# Altium PCB PA_CONTROL_BOARD.PcbDoc
Units mm, origin at the board's own origin, x right, y up, seen from the top; angles counter-clockwise.
Board outline 99.6 x 97.1 mm, 4 copper layers (Top Layer, L2(GND), L3(GND), Bottom Layer), stack 1.57 mm thick; 100 components, 82 nets, 366 pads, 63 vias.
Unrouted connection lines stored in the file: 46.
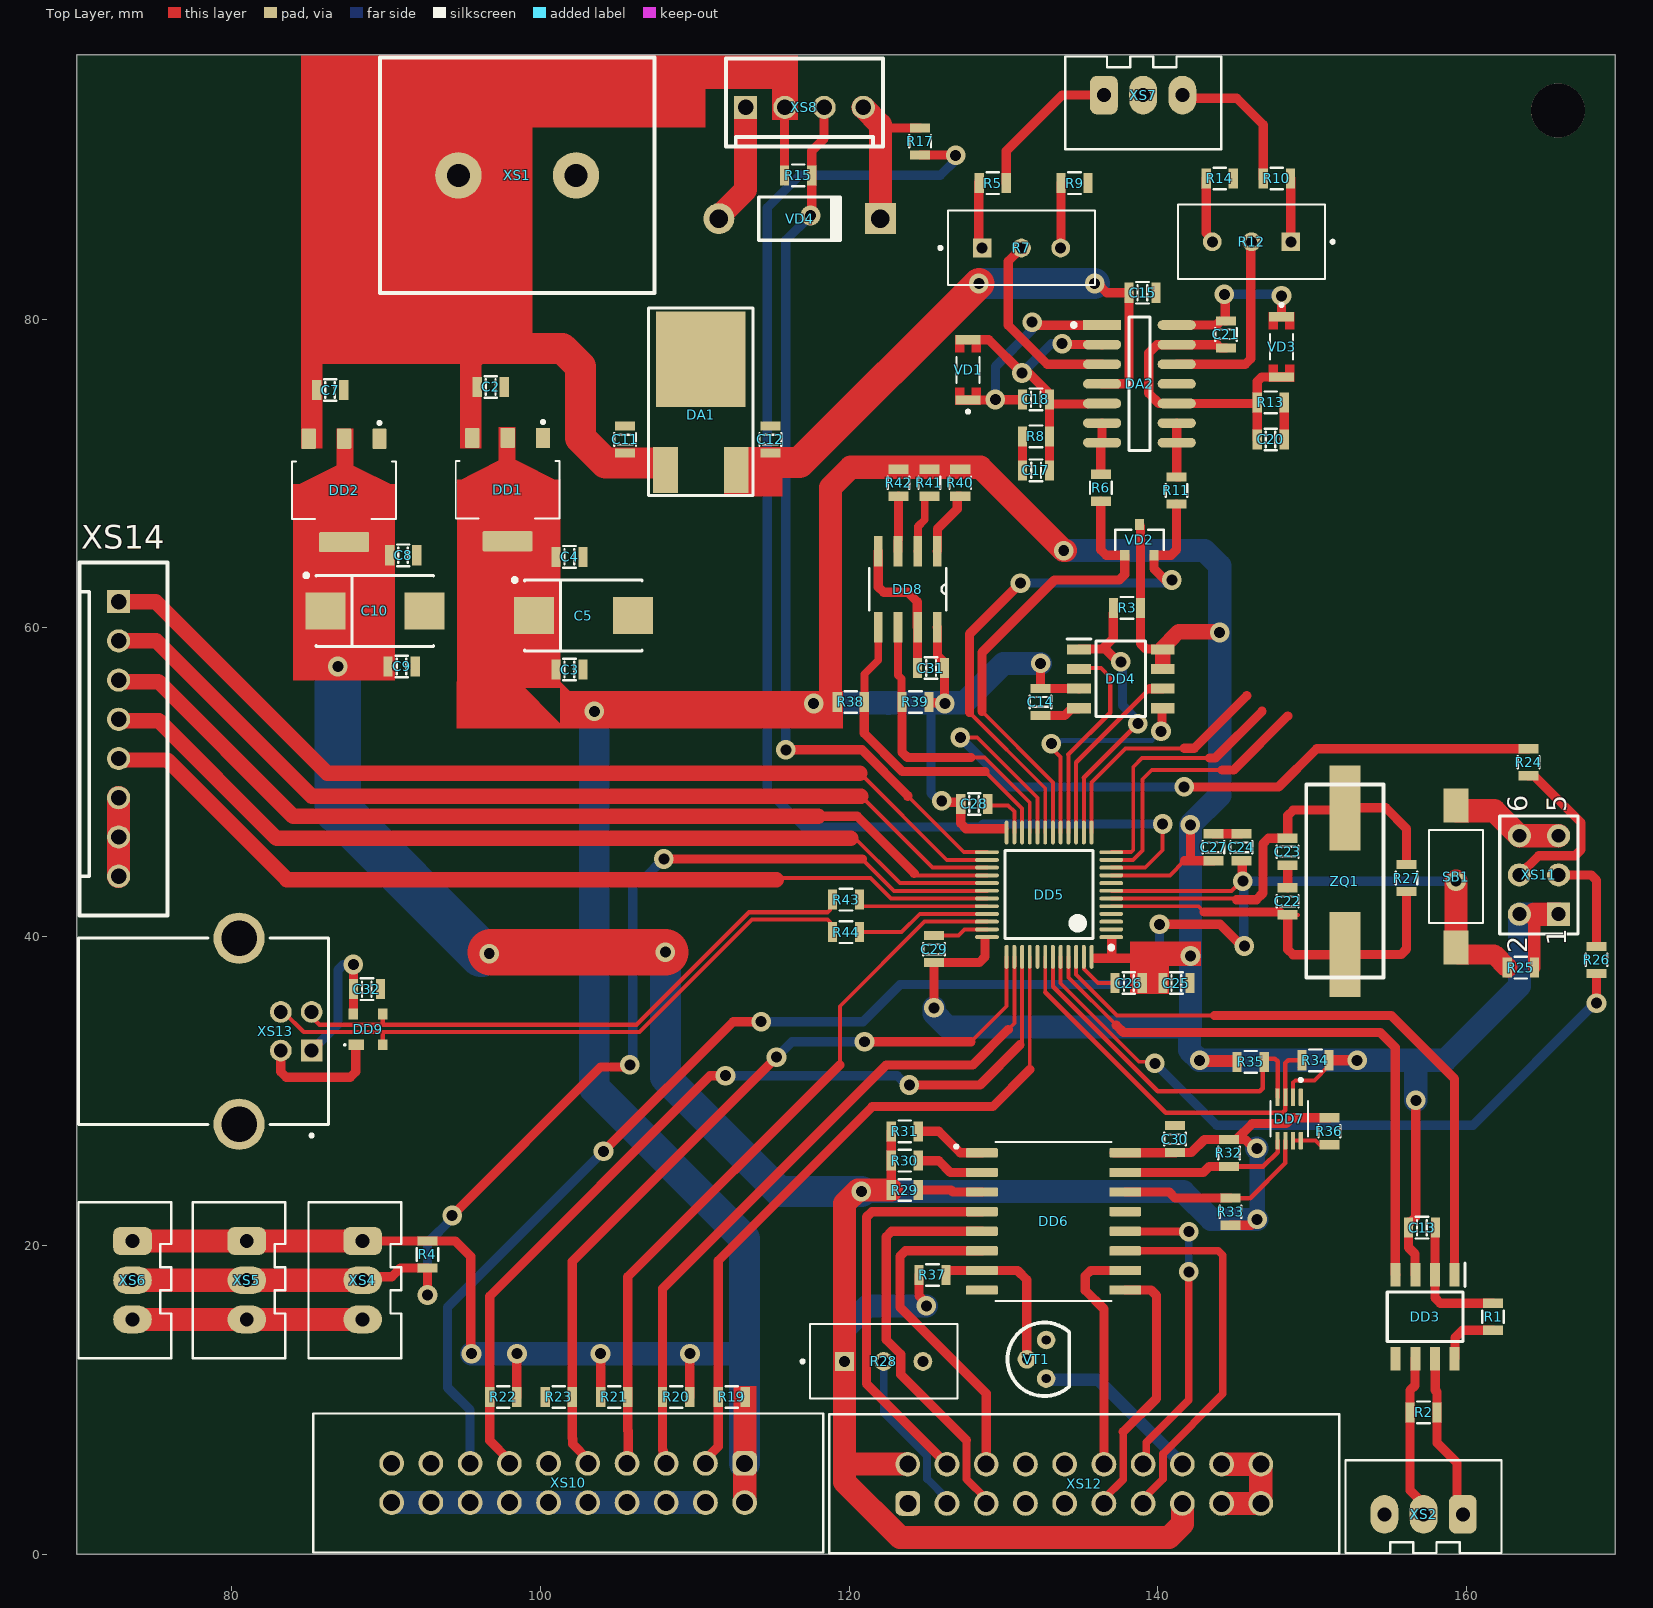
[diagram p0: Top Layer view]
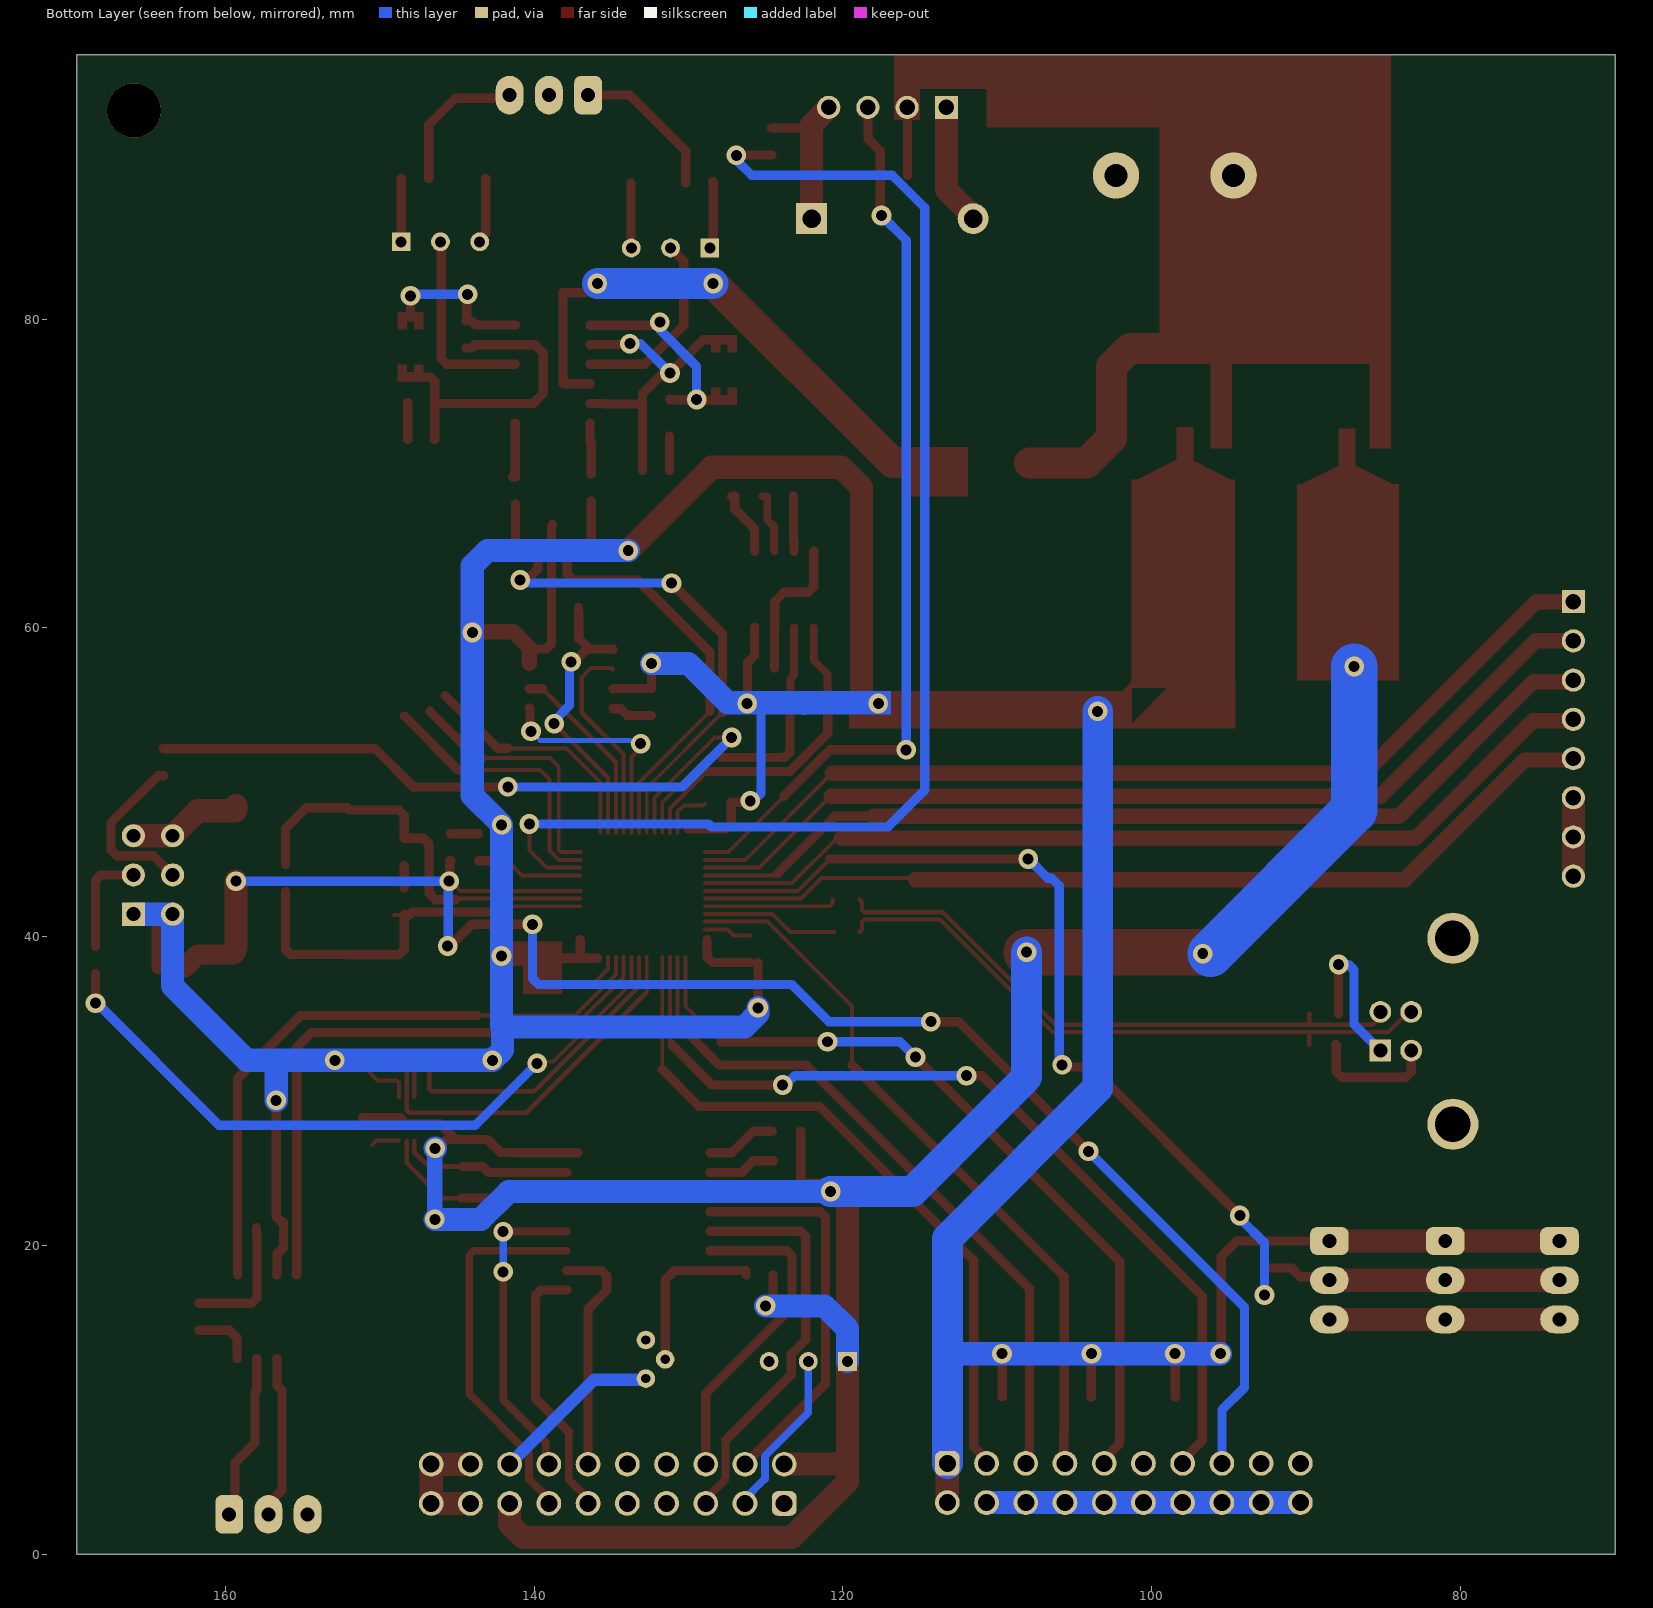
[diagram p1: Bottom Layer view, seen from below]

## Layer stack, top to bottom
Top Solder: solder mask 0.0254, Solder Resist, Dk 3.5
Top Layer: signal copper 0.035
Dielectric 2: prepreg 0.2, PP-017, Dk 4.6
L2(GND): signal copper 0.0175
Dielectric 1: core 1.065, Core-039, Dk 4.6
L3(GND): signal copper 0.0175
Dielectric 3: prepreg 0.2, PP-017, Dk 4.6
Bottom Layer: signal copper 0.035
Bottom Solder: solder mask 0.0254, Solder Resist, Dk 3.5

## Board outline
70,0 169.6,0 169.6,97.1 70,97.1

## Design rules (kind name [scope] priority, off if disabled: settings)
Clearance [All] p1: gap=0.2 ignorepadtopadclearanceinfootprint=FALSE
DiffPairsRouting [InDifferentialPair('USB_D')] p1: maxlimit=0.254 minlimit=0.203 mostfreqgap=0.254 toplayer_maxgap=0.203 toplayer_prefgap=0.203 toplayer_minwidth=0.268 toplayer_maxwidth=0.268 toplayer_prefwidth=0.268 bottomlayer_maxgap=0.203 bottomlayer_prefgap=0.203 bottomlayer_minwidth=0.268 bottomlayer_maxwidth=0.268 bottomlayer_prefwidth=0.268 impedanceprofiledriven=TRUE impedanceprofileid={E65597A1-3157-4E75-9F68-0D89B3AF5645} impedanceprofilevalue=90.000000 maxuncoupledlength=12.7
MatchedLengths [InDifferentialPair('RD')] p1: tolerance=1 checknetsindiffpair=FALSE checkdiffpairvsdiffpair=TRUE checkxsignals=TRUE checkothers=TRUE
PolygonConnect [All] p1: connectstyle=Relief reliefconductorwidth=0.254 reliefentries=4 polygonreliefangle="90 Angle" airgapwidth=0.254
RoutingVias [All] p1: holewidth=0.711 width=1.27 viastyle="Through Hole" minholewidth=0.3 minwidth=0.5 maxholewidth=0.711 maxwidth=1.27
SolderMaskExpansion [All] p1: expansion=0.102 istentingtop=FALSE
Width [All] p1: maxlimit=3 minlimit=0.2 preferedwidth=0.3
29 further rules are at their usual default settings.

## Classes and differential pairs
component class USB: C32 DD9 R43 R44 XS13
component class EEPROM: C31 DD8 R38 R39 R40 R41 R42
component class IIC_LCD: C30 DD6 DD7 R28 R29 R30 R31 R32 R33 R34 R35 R36 R37 VT1 XS12
component class MCU_CORE: C22 C23 C24 C25 C26 C27 C28 C29 DD5 R24 R25 R26 R27 SB1 XS11 XS14 ZQ1
component class FAN_CTRL: R15 R17 VD4 XS8
component class JTAG_MCU: R19 R20 R21 R22 R23 XS10
component class DIRECTIONAL_COUPLER: C15 C17 C18 C20 C21 DA2 R5 R6 R7 R8 R9 R10 R11 R12 R13 R14 VD1 VD2 VD3 XS7
component class FLASH: C14 DD4 R3
component class CAN: C13 DD3 R1 R2 XS2
component class DS18B20: R4 XS4 XS5 XS6
component class POWER_SUPPLY: C2 C3 C4 C5 C7 C8 C9 C10 C11 C12 DA1 DD1 DD2 XS1
differential pair USB_D: +USB_D_P -USB_D_N

## Components (designator, comment, footprint, x,y, rotation, side; value= is the part's Value field where it differs from the comment)
C2 "0.1 uF" C0805C 96.8,75.6 r180 top
C3 "0.1 uF" C0805C 101.9,57.3 r180 top
C4 "0.1 uF" C0805C 101.9,64.6 r180 top
C5 "10uFx10V" TECAP_D 102.8,60.8 r0 top
C7 "0.1 uF" C0805C 86.4,75.4 r180 top
C8 "0.1 uF" C0805C 91.125,64.7 r180 top
C9 "0.1 uF" C0805C 91.025,57.5 r180 top
C10 "10uFx10V" TECAP_D 89.3,61.1 r0 top
C11 "0.33 uF" C0805C 105.5,72.2 r270 top
C12 "0.1 uF" C0805C 114.9,72.2 r270 top
C13 "0.1uF" C0805C 157.1,21.16 r180 top
C14 "0.1uF" C0805C 132.4,55.2 r90 top
C15 "0.1uF" C0805C 139,81.7 r180 top
C17 "1uF" C0805C 132.1,70.2 r0 top
C18 "10n" C0805C 132.1,74.8 r180 top
C20 "1uF" C0805C 147.3,72.2 r180 top
C21 "10n" C0805C 144.4,79 r90 top
C22 "22pF" C0805C 148.4,42.3 r270 top
C23 "22pF" C0805C 148.4,45.5 r90 top
C24 "0.1uF" C0805C 145.4,45.8 r270 top
C25 "0.1uF" C0805C 141.2,37 r180 top
C26 "0.1uF" C0805C 138.1,37 r0 top
C27 "0.1uF" C0805C 143.6,45.8 r270 top
C28 "0.1uF" C0805C 128.1,48.6 r180 top
C29 "0.1uF" C0805C 125.5,39.2 r270 top
C30 "0.1 uF" C0805C 141.1,26.9 r270 top
C31 "0.1 uF" C0805C 125.3,57.4 r0 top
C32 "0.1 uF" C0805C 88.781,36.606 r180 top
DA1 "78M08CDT" SC_TO-252AA 110.4,77.4 r270 top
DA2 "LM224" Texas_Instruments_D0014A_IPC_A 138.8,75.8 r0 top
DD1 "AMS1117-3.3" SOT229P700X180-4N 97.89,68.955 r180 top
DD2 "AMS1117-5.0" SOT229P700X180-4N 87.3,68.9 r180 top
DD3 "SN65HVD230" "SOIC8 (SO-8)" 157.3,15.4 r270 top
DD4 "W25Q128" "SOIC8 (SO-8)" 137.6,56.7 r0 top
DD5 "STM32F103C8T6" STM-LQFP48_L 132.95,42.725 r180 top
DD6 "PCF8574ADW" SOIC127P1030X265-16N 133.24,21.565 r0 top
DD7 "PCA9306DCUT" SOP50P310X90-8N 148.5,28.2 r270 top
DD8 "AT24C128C-SSHM-T" SOIC127P600X175-8N 123.8,62.5 r270 top
DD9 "PRTR5V0U2X" SOT143B 88.85,34 r0 top
R1 "R0805" C0805R 161.7,15.4 r90 top
R2 "120" C0805R 157.2,9.2 r180 top
R3 "10k" C0805R 138,61.3 r0 top
R4 "4k7" C0805R 92.7,19.425 r270 top
R5 "10k" C0805R 129.3,88.8 r0 top
R6 "1k" C0805R 136.3,69.075 r90 top
R7 "20k" TRIM_3296W-1-254LF 131.16,84.6 r0 top
R8 "120k" C0805R 132.1,72.4 r180 top
R9 "4k7" C0805R 134.6,88.8 r180 top
R10 "10k" C0805R 147.7,89.1 r180 top
R11 "1k" C0805R 141.2,68.9 r90 top
R12 "20k" TRIM_3296W-1-254LF 146.06,85 r180 top
R13 "120k" C0805R 147.3,74.6 r180 top
R14 "4k7" C0805R 144,89.1 r180 top
R15 "4k7" C0805R 116.7,89.3 r180 top
R17 "120" C0805R 124.6,91.5 r90 top
R19 "10k" C0805R 112.4,10.2 r0 top
R20 "10k" C0805R 108.8,10.2 r0 top
R21 "10k" C0805R 104.8,10.2 r180 top
R22 "10k" C0805R 97.6,10.2 r0 top
R23 "10k" C0805R 101.2,10.2 r0 top
R24 "10k" C0805R 164,51.3 r90 top
R25 "100k" C0805R 163.5,38 r180 top
R26 "10k" C0805R 168.4,38.5 r270 top
R27 "1M" C0805R 156.1,43.8 r270 top
R28 "RES_VAR" TRIM_3296W-1-254LF 122.24,12.5 r0 top
R29 "10k" C0805R 123.6,23.6 r180 top
R30 "10k" C0805R 123.6,25.5 r180 top
R31 "10k" C0805R 123.6,27.4 r180 top
R32 "4k7" C0805R 144.6,26 r90 top
R33 "4k7" C0805R 144.7,22.2 r270 top
R34 "4k7" C0805R 150.2,32 r0 top
R35 "4k7" C0805R 146,31.9 r180 top
R36 "200k" C0805R 151.1,27.4 r90 top
R37 "4k7" C0805R 125.4,18.1 r180 top
R38 "4k7" C0805R 120.1,55.2 r180 top
R39 "4k7" C0805R 124.3,55.2 r0 top
R40 "10k" C0805R 127.2,69.4 r90 top
R41 "10k" C0805R 125.2,69.4 r90 top
R42 "10k" C0805R 123.2,69.4 r90 top
R43 "10" C0805R 119.8,42.4 r180 top
R44 "10" C0805R 119.8,40.3 r180 top
SB1 "1437566-3 (FSMSM)" 1437566-3 159.3,43.9 r90 top
VD1 "LL4148" DIO_LL4148 127.7,76.7 r90 top
VD2 "BAT54C" BAT54C_SOT23-3 138.8,65.7 r0 top
VD3 "LL4148" DIO_LL4148 148,78.2 r270 top
VD4 "1N4728A" DO-41 116.8,86.5 r0 top
VT1 "SS8050CBU" TO-92-A 132.235,12.637 r270 top
XS1 "POWER" DG25C-B-02P-13 102.32,89.3 r180 top value=Connector
XS2 "CAN" YX-XH-3 159.74,2.6 r180 top
XS4 "DS18B20" YX-XH-3 88.5,20.3 r270 top
XS5 "DS18B20" YX-XH-3 81,20.3 r270 top
XS6 "DS18B20" YX-XH-3 73.6,20.3 r270 top
XS7 "SWR" YX-XH-3 136.5,94.5 r0 top
XS8 "FAN" WF-4 117.11,93.7 r180 top value=Connector
XS10 "Text" IDC-20 101.81,4.63 r180 top value=Connector
XS11 "BOOT" PLD2-3 164.67,44 r90 top value=Connector
XS12 "Text" IDC-20 135.23,4.575 r0 top value=Connector
XS13 "USB" SAMTEC_USB-B-S-X-X-TH 80.5,33.88 r270 top
XS14 "Text" WF-8 72.7,56.62 r90 top value=Connector
ZQ1 "HC49SM" HC49SM 152.1,43.6 r90 top

## Footprints (in the part's own frame and the unit in brackets; to place one, negate y for a bottom-side part, rotate by r counter-clockwise, add the part's x,y. Pads: shape width x height; smd on the part's side, far side on the other; paste and mask are expansions set on the pad)
1437566-3 [mm]
  rect 2.18x1.6 smd: 1(-4.6,0) 2(4.6,0)
  silkscreen extent -3,-1.75 3,1.75, body extent -5.54,-1.75 5.54,1.75, height 4.87
BAT54C_SOT23-3 [mm]
  rect 0.6x0.7 smd: 1(-0.95,-1) 2(0.95,-1) 3(0,1)
  silkscreen extent -1.57,-0.65 1.57,0.66, body extent -1.45,-1.17 1.45,1.13, height 1.1
C0805C [mm]
  rect 0.6x1.3 smd: 1(-0.875,0) 2(0.875,0)
  silkscreen extent -0.4,-0.7 0.4,0.7, body extent -1,-0.6 1,0.6, height 0.8
C0805R [mm]
  rect 0.6x1.3 smd: 1(-0.875,0) 2(0.875,0)
  silkscreen extent -0.4,-0.7 0.4,0.7, body extent -1,-0.6 1,0.6, height 0.5
DG25C-B-02P-13 [mm]
  round 3 hole 1.5: 1(0,0) 2(7.62,0)
  silkscreen extent -5.08,-7.62 12.7,7.62, body extent -4.56,-6.44 12.18,6.79, height 14.8
DIO_LL4148 [mm]
  rect 0.6x1.65 smd: 1(-1.95,0) 2(1.95,0)
  Top Layer region: -1.15,0.25 -1.65,0.25 -1.65,-0.25 -1.15,-0.25 -1.15,-0.825 -2.24,-0.825 -2.24,0.825 -1.15,0.825
  Top Layer region: 2.25,-0.825 1.15,-0.825 1.15,-0.25 1.65,-0.25 1.65,0.25 1.15,0.25 1.15,0.825 2.25,0.825
  silkscreen extent -2.8,-0.75 0.83,0.75, body extent -1.73,-0.75 1.73,0.75, height 1.5
DO-41 [mm] "Diode, Axial; Body 5.2 x 2.7 mm (LxDia. max), Lead Dia. 0.86 mm (max)"
  round 2 hole 1.2: 1(-5.23,0)
  rect 2x2 hole 1.2: 2(5.23,0)
  silkscreen extent -2.65,-1.4 2.75,1.4
HC49SM [mm]
  rect 5.5x2 smd: 1(-4.75,0) 2(4.75,0)
  silkscreen extent -6.25,-2.5 6.25,2.5, body extent -6.2,-2.35 6.2,2.35, height 3.8
IDC-20 [mm]
  rrect50% 1.6x1.6 hole 1.1: 1(-11.43,-1.27)
  round 1.6 hole 1.1: 2(-11.43,1.27) 3(-8.89,-1.27) 4(-8.89,1.27) 5(-6.35,-1.27) 6(-6.35,1.27) 7(-3.81,-1.27) 8(-3.81,1.27) 9(-1.27,-1.27) 10(-1.27,1.27) 11(1.27,-1.27) 12(1.27,1.27) 13(3.81,-1.27) 14(3.81,1.27) 15(6.35,-1.27) 16(6.35,1.27) 17(8.89,-1.27) 18(8.89,1.27) 19(11.43,-1.27) 20(11.43,1.27)
  silkscreen extent -16.51,-4.5 16.51,4.5, body extent -16.5,-4.5 16.5,4.5, height 9
PLD2-3 [mm]
  rect 1.5x1.5 hole 0.9: 1(-2.54,-1.27)
  round 1.5 hole 0.9: 2(-2.54,1.27) 3(0,-1.27) 4(0,1.27) 5(2.54,-1.27) 6(2.54,1.27)
  silkscreen extent -3.81,-2.54 3.81,2.54, body extent -3.84,-2.52 3.78,2.56, height 8.6
SAMTEC_USB-B-S-X-X-TH [mm]
  rect 1.408x1.408 hole 0.9: 1(1.25,4.7)
  round 1.408 hole 0.9: 2(-1.25,4.7) 3(-1.25,2.7) 4(1.25,2.7)
  round 3.316 hole 2.3: S1(-6.02,0) S2(6.02,0)
  silkscreen extent -6.05,-10.4 6.85,5.8, body extent -7.25,-10.4 7.25,6.1, height 10.7
SC_TO-252AA [mm] "D-PAK"
  rect 3x1.6 smd: 1(7.18,-2.286) 3(7.18,2.286)
  rect 6.2x5.8 smd: 2(0,0)
  silkscreen extent -3.3,-3.38 8.84,3.38, body extent -2.7,-3.29 7,3.29, height 2.3
"SOIC8 (SO-8)" [mm]
  rect 1.525x0.65 smd: 1(-2.712,1.905) 2(-2.712,0.635) 3(-2.712,-0.635) 4(-2.712,-1.905) 5(2.712,-1.905) 6(2.712,-0.635) 7(2.712,0.635) 8(2.712,1.905)
  silkscreen extent -3.47,-2.45 1.6,2.58, body extent -3.08,-2.5 3.08,2.5, height 2
SOIC127P600X175-8N [mil]
  rect 78x22 smd: 1(-97,75) 2(-97,25) 3(-97,-25) 4(-97,-75) 5(97,-75) 6(97,-25) 7(97,25) 8(97,75)
  silkscreen extent -54,-98 54,98, body extent -118,-96 118,96, height 69
SOIC127P1030X265-16N [mm]
  rrect25% 2.06x0.6 smd: 1(-4.64,4.445) 2(-4.64,3.175) 3(-4.64,1.905) 4(-4.64,0.635) 5(-4.64,-0.635) 6(-4.64,-1.905) 7(-4.64,-3.175) 8(-4.64,-4.445) 9(4.64,-4.445) 10(4.64,-3.175) 11(4.64,-1.905) 12(4.64,-0.635) 13(4.64,0.635) 14(4.64,1.905) 15(4.64,3.175) 16(4.64,4.445)
  silkscreen extent -6.4,-5.15 3.75,5.15, body extent -5.07,-5.14 5.23,5.16, height 2.65
SOP50P310X90-8N [mm]
  rrect25% 1.12x0.27 smd: 1(-1.405,0.75) 2(-1.405,0.25) 3(-1.405,-0.25) 4(-1.405,-0.75) 5(1.405,-0.75) 6(1.405,-0.25) 7(1.405,0.25) 8(1.405,0.75)
  silkscreen extent -2.62,-1.2 1.15,1.2, body extent -1.55,-1 1.55,1, height 0.9
SOT143B [mm]
  rect 1x0.7 smd: 1(-0.75,-1)
  rect 0.6x0.7 smd: 2(0.95,-1) 3(0.95,1) 4(-0.95,1)
  silkscreen extent -1.55,-1.05 -1.45,-0.95, body extent -1.45,-1.15 1.45,1.15, height 1.1
SOT229P700X180-4N [mm]
  rrect15% 0.93x1.31 smd: 1(-2.29,-3.345) 2(0,-3.345) 3(2.29,-3.345)
  rrect15% 3.24x1.31 smd: 4(0,3.345)
  silkscreen extent -3.36,-4.47 3.36,1.86, body extent -3.25,-3.5 3.25,3.5, height 1.87
STM-LQFP48_L [mm] "QFP, 48-Leads, Body 7x7mm, Pitch 0.5mm, IPC High Density"
  oval 1.55x0.25 smd: 1(-4.025,2.75) 2(-4.025,2.25) 3(-4.025,1.75) 4(-4.025,1.25) 5(-4.025,0.75) 6(-4.025,0.25) 7(-4.025,-0.25) 8(-4.025,-0.75) 9(-4.025,-1.25) 10(-4.025,-1.75) 11(-4.025,-2.25) 12(-4.025,-2.75) 25(4.025,-2.75) 26(4.025,-2.25) 27(4.025,-1.75) 28(4.025,-1.25) 29(4.025,-0.75) 30(4.025,-0.25) 31(4.025,0.25) 32(4.025,0.75) 33(4.025,1.25) 34(4.025,1.75) 35(4.025,2.25) 36(4.025,2.75)
  oval 0.25x1.55 smd: 13(-2.75,-4.025) 14(-2.25,-4.025) 15(-1.75,-4.025) 16(-1.25,-4.025) 17(-0.75,-4.025) 18(-0.25,-4.025) 19(0.25,-4.025) 20(0.75,-4.025) 21(1.25,-4.025) 22(1.75,-4.025) 23(2.25,-4.025) 24(2.75,-4.025) 37(2.75,4.025) 38(2.25,4.025) 39(1.75,4.025) 40(1.25,4.025) 41(0.75,4.025) 42(0.25,4.025) 43(-0.25,4.025) 44(-0.75,4.025) 45(-1.25,4.025) 46(-1.75,4.025) 47(-2.25,4.025) 48(-2.75,4.025)
  silkscreen extent -4.15,-2.85 2.85,3.55, body extent -3.5,-3.5 3.5,3.5, height 1.6
TECAP_D [mm]
  rect 2.6x2.4 smd: 1(-3.2,0) 2(3.2,0)
  silkscreen extent -4.57,-2.3 3.8,2.42, body extent -3.75,-2.25 3.75,2.25, height 3.1
Texas_Instruments_D0014A_IPC_A [mm]
  rect 2.474x0.622 smd paste+0 mask+0: 1(-2.416,3.81)
  rrect100% 2.474x0.622 smd paste+0 mask+0: 2(-2.416,2.54) 3(-2.416,1.27) 4(-2.416,0) 5(-2.416,-1.27) 6(-2.416,-2.54) 7(-2.416,-3.81) 8(2.416,-3.81) 9(2.416,-2.54) 10(2.416,-1.27) 11(2.416,0) 12(2.416,1.27) 13(2.416,2.54) 14(2.416,3.81)
  silkscreen extent -4.37,-4.33 0.68,4.33, body extent -4.15,-4.82 4.15,4.82, height 0.25
TO-92-A [mm]
  round 1.2 hole 0.6: 1(0,-0.725) 2(1.25,0.525) 3(-1.25,0.525)
  silkscreen extent -2.38,-1.97 2.38,2.02, body extent -2.4,-1.92 2.4,2.01, height 10
TRIM_3296W-1-254LF [mm]
  rect 1.218x1.218 hole 0.71: 1(-2.54,0)
  round 1.218 hole 0.71: 2(0,0) 3(2.54,0)
  silkscreen extent -5.35,-2.41 4.76,2.42, body extent -4.76,-2.41 4.76,2.42, height 11.55
WF-4 [mm]
  rect 1.5x1.5 hole 1: 1(3.81,0)
  round 1.5 hole 1: 2(1.27,0) 3(-1.27,0) 4(-3.81,0)
  silkscreen extent -5.08,-3.18 5.08,2.54, body extent -5.08,-3.18 5.08,2.62, height 11.76
WF-8 [mm]
  rect 1.5x1.5 hole 1: 1(5.08,0)
  round 1.5 hole 1: 2(2.54,0) 3(0,0) 4(-2.54,0) 5(-5.08,0) 6(-7.62,0) 7(-10.16,0) 8(-12.7,0)
  silkscreen extent -15.24,-3.18 7.62,2.54
YX-XH-3 [mm]
  rrect50% 1.8x2.5 hole 0.9: 1(0,0)
  oval 1.8x2.5 hole 0.9: 2(2.54,0) 3(5.08,0)
  silkscreen extent -2.5,-3.5 7.6,2.5, body extent -2.4,-3.37 7.5,2.38, height 7

## Part data
C2 C3 C4 C7 C8 C9 C11 C12 C13 C14 C15 C17 C18 C20 C21 C22 C23 C24 C25 C26 C27 C28 C29 C30 C31 C32: library part CAP_0805, Published=18.05.2010, Publisher="Andrew Danich", Type=Конденсатор
C5 C10: library part CAP_TECAP_A, Published=20.08.2010, Publisher="Andrew Danich", Type=Конденсатор
DD1 DD2: "Sot223/Pkg 1-Amp 3.3-Volt Low Drop Out Voltage Regulatator", Package=None, Availability=Unavailable, MF="Advanced Monolithic Systems", MP=AMS1117-3.3, Price=None, SnapEDA_Link=https://www.snapeda.com/parts/AMS1117-3.3/Advanced%20Monolithic%20Systems/view-part/53450/?ref=snap
DD3: "Высокоскоростной CAN-Трансивер, 1Мб/с, 12В/24В, до 112 узлов", Published=26.02.2013, Publisher="Andrew Danich", Type=Микросхема
DD5: "ARM Cortex-M3 32-bit MCU, 64 KB Flash, 20 KB Internal RAM, 37 I/Os, 48-pin LQFP, -40 to 85 degC, Tray", I/Os (High Current)=37, Operating Frequency(F) (Processor speed) (MHz)=72, Supplier Part Number 1=497-6063-ND, Supply Voltage(Vcc) min (V)=2, A/D Converter="2x12-bit (10 Channel)", ComponentLink1Description="Manufacturer URL", ComponentLink1URL=http://www.st.com/web/en/home.html, ComponentLink2Description=Datasheet, ComponentLink2URL=http://www.st.com/st-web-ui/static/active/en/resource/technical/document/datasheet/CD00161566.pdf, ComponentLink3Description="Package Specification", ComponentLink3URL=http://www.st.com/st-web-ui/static/active/en/resource/technical/document/datasheet/DM00058181.pdf, Core="ARM Cortex-M3", DatasheetVersion="Rev. 16", FLASH Size (Prog) (kB)=64, Internal RAM Size (kB)=20, Mounting Technology="Surface Mount", PackageDescription="48-Pin Low Profile Quad Flat Package, 7 x 7 mm Body, 0.5 mm Pitch", PackageReference=LQFP48, PackageVersion="Rev. 6, 06/2013", Packing=Tray, PartNumber=STM32F103C8T6, Supplier 1=Digi-Key, Supplier 2=Farnell, Supplier 3=Newark, Supplier 4=Newark, Supplier 5=Mouser, Supplier Part Number 2=1447637, Supplier Part Number 3=59M2182, Supplier Part Number 4=57P1222, Supplier Part Number 5=511-STM32F103C8T6
DD6: "Remote 8-Bit I/O Expander for I2C-Bus 16-SOIC -40 to 85", Package="SOIC-16 Texas Instruments", Availability=Warning, DigiKey-Purchase-URL=https://snapeda.com/shop?store=DigiKey&id=554599, MF="Texas Instruments", Mouser-Purchase-URL=https://snapeda.com/shop?store=Mouser&id=554599, MP=PCF8574ADW, Price=None, SnapEDA_Link=https://www.snapeda.com/parts/PCF8574ADW/Texas%20Instruments/view-part/554599/?ref=snap, Texas_Instruments-Purchase-URL=https://snapeda.com/shop?store=Texas+Instruments&id=554599
DD7: "2-bit bidirectional I2C bus and SMBus voltage-level shifter 8-VSSOP -40 to 85", Package="VSSOP-8 Texas Instruments", Arrow_Electronics-Purchase-URL=https://snapeda.com/shop?store=Arrow+Electronics&id=39070, Availability=Good, DigiKey-Purchase-URL=https://snapeda.com/shop?store=DigiKey&id=39070, MF="Texas Instruments", Mouser-Purchase-URL=https://snapeda.com/shop?store=Mouser&id=39070, MP=PCA9306DCUT, Price=None, SnapEDA_Link=https://www.snapeda.com/parts/PCA9306DCUT/Texas%20Instruments/view-part/39070/?ref=snap, Texas_Instruments-Purchase-URL=https://snapeda.com/shop?store=Texas+Instruments&id=39070
DD8: "EEPROM Memory IC 128Kb _16K x 8_ IÂ²C 1MHz 550ns 8-SOIC", Package="SO-8 Microchip", Availability=Unavailable, MF=Microchip, MP=AT24C128C-SSHM-T, Price=None, SnapEDA_Link=https://www.snapeda.com/parts/AT24C128C-SSHM-T/Microchip/view-part/1771999/?ref=snap
DD9: library part PRTR5V0U2X,215, "Ultra low capacitance double rail-to-rail ESD protection diode", Package=None, Availability=Unavailable, MP=PRTR5V0U2X,215, Price=None
R2 R4 R19 R20 R21 R22 R23: library part R0805, Published=24.03.2010, Publisher="Andrew Danich", Type=Резистор
R3 R5 R6 R8 R9 R10 R11 R13 R14 R15 R17 R24 R25 R26 R27 R29 R30 R31 R32 R33 R34 R35 R36 R37 R38 R39 R40 R41 R42 R43 R44: library part RES_0805, Published=24.03.2010, Publisher="Andrew Danich", Type=Резистор
R7 R12: library part Resistor-Trimmer-1, Published=27.07.2015, Publisher="Andrew Danich", Type="Подстроечный резистор"
SB1: library part BT-01x-01p, Published=17.04.2014, Publisher="Andrew Danich", Type=Переключатель
VD2: "Small Signal Schottky Diode, Dual Common Cathode, 30 V, 200 mA, 400 mV, 600 mA, 125 C"
XS1: library part CONNECT_PW, Published=07.03.2013, Publisher="Andrew Danich", Type=Розетка
XS2: library part CONNECT_CAN, Published=07.03.2013, Publisher="Andrew Danich", Type=Розетка
XS7: library part DIR_COUP, Published=07.03.2013, Publisher="Andrew Danich", Type=Розетка
XS8: library part FAN_CON, Published=07.03.2013, Publisher="Andrew Danich", Type=Розетка
XS10: library part JTAG, Published=07.03.2013, Publisher="Andrew Danich", Type=Розетка
XS11: library part CONNECT_BOOT, Published=07.03.2013, Publisher="Andrew Danich", Type=Розетка
XS12: library part CONNECT_LCD, Published=07.03.2013, Publisher="Andrew Danich", Type=Розетка
XS13: library part CONNECT_USB, Published=11.04.2016, Publisher="Andrew Danich", Type=Розетка
XS14: library part Con-8-F, Published=07.03.2013, Publisher="Andrew Danich", Type=Розетка
DA1: Published=13.08.2015, Publisher="Andrew Danich", Type=Микросхема
DA2: Published=29.07.2015, Publisher="Andrew Danich", Type=Микросхема
R1: Published=24.03.2010, Publisher="Andrew Danich", Type=Резистор
R28: Published=27.07.2015, Publisher="Andrew Danich", Type="Подстроечный резистор"
VD1 VD3: Published=18.05.2010, Publisher="Andrew Danich", Type=Диод
VD4: Published=20.05.2013, Publisher="Andrew Danich", Type=Стабилитрон
VT1: Published=07.05.2013, Publisher="Andrew Danich", Type=Транзистор
XS4 XS5 XS6: Published=07.03.2013, Publisher="Andrew Danich", Type=Розетка
ZQ1: Published=08.03.2013, Publisher="Andrew Danich", Type=Резонатор

## Free pads (board coordinates)
  round 3.5 hole 3.5: GND(165.9,93.5)

## Via types
v1: diameter 1.27, hole 0.711, Top Layer to Bottom Layer, 63 vias

## Nets (pads, with @x,y where several pads share a name; then routed paths per layer and width w, separated by ;. In a path a pad name is that pad's centre, name@x,y a point inside that pad or via, vN(x,y) a via of type N, cw(c..) or ccw(c..) an arc to the next point about the centre after c; other vN are vias at no path point)
3V3: C3.2 C4.2 C5.1 C13.2 C14.2 C25.2 C26.2 C27.2 C28.2 C29.2 C31.2 DD1.2 DD1.4 DD3.3 DD4.3 DD4.7 DD4.8 DD5.1 DD5.9 DD5.24 DD5.36 DD5.48 DD7.2 DD8.8 R3.2 R4.1 R19.2 R20.2 R21.2 R22.2 R25.1 R34.2 R35.2 R38.2 R39.2 R40.2 R41.2 R42.2 VD2.3 XS4.1 XS5.1 XS6.1 XS10.1 XS10.2 XS11.1 XS11.2 | length 336.5
  Top Layer w0.254: DD5.9 140.775,43.975 141.725,44.925 ; DD7.2 148.758,29.613 148.758,30.551 148.907,30.7 150.125,30.7 151.075,31.65 R34.2
  Top Layer w0.6: XS4.1 R4.1 94.5,20.3 95.5,19.3 95.5,13.05 v1(95.55,13) ; R22.2 98.475,12.975 v1(98.5,13) ; v1(103.9,13) 103.925,12.975 R21.2 ; R20.2 109.675,12.975 v1(109.7,13) ; R42.2 R41.2 R40.2 ; R39.2 125.175,55.15 126.15,55.15 v1@126.175,55.125 ; v1(125.5,35.4) C29.2 ; DD8.8 125.726,60.016 125.726,58.199 126.175,57.75 C31.2 v1@126.175,55.125 ; C29.2@126,38.325 128.425,38.325 128.8,38.7 128.8,39.8 ; v1(126,48.8) 126.1,48.7 127.225,48.7 C28.2 127.225,47.351 127.576,47 130.025,47 ; v1(126.2,55.1) v1@126.175,55.125 ; v1(132.4,57.7) C14.2 132.926,56.075 132.927,56.076 134.877,56.076 DD4.3 ; 135.9,38.6 137,38.6 ; 137,39.8 137,38.6 ; VD2.3 138.8,66.65 138.875,66.575 R3.2 138.875,58.981 139.226,58.63 DD4.8@140.226,58.63 ; C25.2 C26.2 138.975,38.249 138.624,38.6 137,38.6 ; 141.725,44.925 142.1,44.925 ; v1(142.1,47.245) 142.1,44.925 ; C27.2 142.1,44.925 ; DD3.3 156.64,18.137 156.64,19.46 156.225,19.875 C13.2 156.225,21.51 156.349,21.51 156.7,21.861 v1(156.7,29.4)
  Top Layer w0.7: R34.2 v1(152.9,32)
  Top Layer w0.8: v1(142.7,32) 142.75,31.95 145.075,31.95 R35.2 ; R25.1 164.375,41.435 164.4,41.46
  Top Layer w1: DD4.8@140.226,58.63 140.75,59.153 140.75,59.166 141.335,59.752 143.948,59.752 v1(144,59.7) ; 140.3,57.7 140.3,58.593 DD4.8
  Top Layer w1.5: XS6.1 XS5.1 XS4.1 ; 98.6,57.7 99.325,57.7 99.775,57.25 ; XS10.2 XS10.1 ; 118.8,54.8 118.8,69.096 120.104,70.4 128.5,70.4 v1(133.9,65) v1@134,65 ; 164.4,41.46 XS11.1
  Bottom Layer w0.6: 125.3,55 125.3,49.3 125.8,48.8 v1(126,48.8)
  Bottom Layer w1.5: v1(95.55,13) v1(98.5,13) v1(103.9,13) v1(109.7,13) 113.06,13 113.24,13.18 ; 122.55,55.1 122.6,55.15 125.3,55.15 ; v1(125.5,35.4) 125.5,35.029 126.379,34.15 142.039,34.15 ; v1@126.2,55.15 127.45,55.15 130,57.7 v1(132.4,57.7) ; v1(133.9,65) 143.021,65 144,64.021 v1(144,59.7) 144,49.145 v1(142.1,47.245) 142.1,38.759 v1(142.108,38.751) 142.108,34.219 142.039,34.15 ; v1(156.7,29.4) 156.692,29.408 156.692,32 ; XS11.1 XS11.2 163.4,36.8 158.6,32 156.692,32 ; 142.039,34.15 142.039,32.661 v1(142.7,32) v1(152.9,32) 156.692,32
  Bottom Layer w2: v1(103.5,54.6) 103.5,30.2 113.24,20.46 113.24,13.18 XS10.1
  other v1: 117.7,55.1
5V: C8.2 C9.2 C10.1 C30.2 DD2.2 DD2.4 DD6.16 R28.1 R29.2 R30.2 R31.2 R32.2 R33.2 R36.2 R37.2 XS12.2 XS12.15 | length 172.2
  Top Layer w0.6: R29.2 R30.2 R31.2 ; R37.2 124.525,16.756 125,16.281 v1(125,16.1) ; DD6.16@137.15,26.01 141.135,26.01 141.15,26.025 142.161,26.025 143.011,26.875 R32.2 R32.2@145.075,26.875 ; R33.2 146.044,21.325 v1(146.419,21.7) ; v1(146.4,26.3) 146.219,26.3 145.644,26.875 R32.2@145.075,26.875 ; R36.2 148.668,28.275 148.293,27.9 146.1,27.9 R32.2@145.075,26.875
  Top Layer w1.5: R29.2 120.579,23.6 119.7,22.721 R28.1 119.7,5.864 ; XS12.2 123.781,5.864 119.7,5.864 ; XS12.15 141.599,3.286 141.599,1.979 140.72,1.1 123.296,1.1 119.7,4.696 119.7,5.864
  Top Layer w2: v1(96.7,38.9) v1@96.8,39
  Top Layer w3: v1@96.8,39 v1(108.1,39)
  Bottom Layer w1: v1(146.419,21.7) v1@146.419,26.281
  Bottom Layer w1.5: R28.1 119.7,14.6 121.2,16.1 v1(125,16.1) ; v1(120.8,23.5) 141.642,23.5 143.442,21.7 v1(146.419,21.7) ; v1(146.4,26.3) v1@146.419,26.281
  Bottom Layer w2: v1@96.2,38.9 v1(96.7,38.9) ; v1(108.1,39) 108.1,30.9 115.5,23.5 v1(120.8,23.5)
  Bottom Layer w3: v1(86.9,57.5) 86.9,48.2 v1@96.2,38.9
+8V: C12.2 C15.2 DA1.3 DA2.4 | length 40.3
  Top Layer w0.6: v1(135.9,82.3) 136.081,82.3 136.681,81.7 C15.2 138.125,75.825 138.1,75.8 DA2.4
  Top Layer w1.5: 113.8,70.1 114.3,69.6 114.775,70.075 ; 114.721,69.6 114.721,70.546 ; 114.775,70.775 114.95,70.95
  Top Layer w2: 113.8,70.1 114.775,70.1 ; 114.7,70.1 114.7,70.7 116.8,70.7 v1(128.4,82.3)
  Bottom Layer w2: v1(128.4,82.3) v1(135.9,82.3)
+12V: C2.2 C7.2 C11.2 DA1.1 DD1.3 DD2.3 R15.2 XS1.2 XS8.2 | length 33
  Top Layer w0.6: R15.2 XS8.2@115.825,93.685
  Top Layer w1.5: 86.54,90.86 87,90.4 ; 87.54,79.86 88,79.4
  Top Layer w2: 92,87.1 92,84.6 98.5,78.1 101.428,78.1 102.6,76.928 102.6,72.3 104.234,70.666 DA1.1@107.914,70.666 ; 95.3,78.1 95.6,77.8
A0: DD6.1 R31.1 | length 4.6
  Top Layer w0.6: R31.1@124.575,27.4 125.8,27.4 127.19,26.01 DD6.1
A1: DD6.2 R30.1 | length 4.4
  Top Layer w0.6: R30.1@124.5,25.5 125.8,25.5 126.56,24.74 DD6.2
A2: DD6.3 R29.1 | length 4.2
  Top Layer w0.6: R29.1 126.6,23.6 126.73,23.47 DD6.3
BIAS: DD5.26 XS14.1 | length 63.2
  Top Layer w0.254: 120.7,50.6 126.325,44.975 DD5.26
  Top Layer w1: XS14.1 75.1,61.7 86.2,50.6 120.7,50.6
CAN1_RXD: DD3.4 DD5.45 | length 39.1
  Top Layer w0.254: DD5.45 134.202,38.698 134.202,37.373 137.302,34.273
  Top Layer w0.6: 137.302,34.273 137.775,33.8 154.4,33.8 155.37,32.83 155.37,18.137 DD3.4
CAN1_TXD: DD3.1 DD5.46 | length 41.1
  Top Layer w0.254: DD5.46 134.702,38.698 134.702,37.547 137.349,34.9 143.66,34.9
  Top Layer w0.6: 143.66,34.9 155.1,34.9 159.205,30.795 DD3.1
DS18B20: DD5.30 R4.2 XS4.2 XS5.2 XS6.2 | length 78.7
  Top Layer w0.254: 120.847,45.035 122.907,42.975 DD5.30
  Top Layer w0.6: XS4.2 88.73,17.99 90.39,17.99 90.95,18.55 R4.2 v1(92.7,16.8) ; v1(94.3,21.95) 103.922,31.572 105.672,31.572 v1(105.8,31.7) ; v1(108,45.035) 120.847,45.035
  Top Layer w1.5: XS6.2 XS5.2 XS4.2
  Bottom Layer w0.6: v1(92.7,16.8) 92.7,20.169 94.3,21.769 v1(94.3,21.95) ; v1(105.8,31.7) 106,31.9 106,43.3 106.485,43.785 106.739,43.785 107.989,45.035 v1(108,45.035)
FLASH_CLK: DD4.6 DD5.15 | length 12.1
  Top Layer w0.254: DD5.15 134.7,51.3
  Top Layer w0.3: 134.7,51.3 139.465,56.065
  Top Layer w0.6: 139.465,56.065 DD4.6
FLASH_CS: DD4.1 DD5.14 R3.1 | length 19
  Top Layer w0.254: DD5.14 135.2,50.3
  Top Layer w0.3: 135.2,50.3 v1(138.7,53.8)
  Top Layer w0.6: DD4.1 134.913,58.63 135.576,58.63 135.578,58.631 136.405,58.631 ; R3.1 137.125,60.95 137.1,60.925 137.1,59.326 136.405,58.631 ; v1(137.6,57.8) 137.418,57.8 136.587,58.631 136.405,58.631
  Bottom Layer w0.6: v1(137.6,57.8) 137.7,57.7 137.7,54.981 138.7,53.981 v1(138.7,53.8)
FLASH_MISO: DD4.2 DD5.16 | length 13.5
  Top Layer w0.254: DD5.16 134.2,51.8 ; DD4.2@134.923,57.3 DD4.2 134.953,57.4 136.3,57.4 136.9,56.8
  Top Layer w0.3: 134.2,51.8 136.9,54.5 136.9,56.8
FLASH_MOSI: DD4.5 DD5.17 | length 15
  Top Layer w0.254: v1(133.1,52.5) 133.1,52.225 133.7,51.625 DD5.17
  Top Layer w0.6: v1(140.2,53.3) 140.256,53.356 140.256,54.77 140.281,54.795 DD4.5
  Bottom Layer w0.254: 139.6,52.7 v1(140.2,53.3)
  Bottom Layer w0.322: v1(133.1,52.5) 133.281,52.681 133.744,52.681 133.763,52.7 139.6,52.7
GND: C2.1 C3.1 C4.1 C5.2 C7.1 C8.1 C9.1 C10.2 C11.1 C12.1 C13.1 C14.1 C15.1 C17.1 C20.1 C22.1 C23.1 C24.1 C25.1 C26.1 C27.1 C28.1 C29.1 C30.1 C31.1 C32.1 DA1.2 DA2.11 DD1.1 DD2.1 DD3.2 DD4.4 DD5.8 DD5.23 DD5.35 DD5.47 DD6.8 DD7.1 DD8.4 DD8.7 DD9.1 R1.2 R8.2 R9.1 R13.1 R14.1 R23.1 R28.3 SB1.2 VD4.1 VT1.3 XS1.1 XS2.3 XS4.3 XS5.3 XS6.3 XS7.2 XS8.1 XS10.4 XS10.6 XS10.8 XS10.10 XS10.12 XS10.14 XS10.16 XS10.18 XS10.20 XS11.5 XS11.6 XS12.1 XS12.17 XS12.18 XS12.19 XS12.20 XS13.4 XS14.6 XS14.7 XS14.8 | length 109.8
  Top Layer w0.254: C29.1@126,40.075 127.075,40.075 127.475,40.475 DD5.35 ; C28.1 129.075,48.5 130.3,48.5 130.7,48.1 DD5.23 ; DD5.47 135.202,38.698 135.202,37.909 136.111,37 C26.1
  Top Layer w0.6: XS13.4 83.2,31.251 83.551,30.9 87.7,30.9 88.051,31.251 88.051,32.951 DD9.1 ; DD8.4 121.895,62.651 122.246,62.3 123.8,62.3 124.414,61.686 124.414,60.057 DD8.7 124.425,60.026 C31.1 ; C17.1 R8.2 ; C14.1 132.926,54.325 132.927,54.326 133.956,54.326 134.399,54.77 134.863,54.77 DD4.4 ; C27.1 C24.1 ; C20.1 R13.1 ; C22.1 C23.1@148.4,44.6 ; DD3.2 157.935,16.626 158.286,16.275 R1.2 ; DD3.2@157.943,18.12 157.943,20.778 157.975,20.81 C13.1@157.975,21.152
  Top Layer w1.5: XS14.8 XS14.7 XS14.6 ; XS6.3 XS5.3 XS4.3 ; VD4.1 111.57,86.635 113.3,88.365 XS8.1 ; XS12.17 XS12.19 XS12.20 XS12.18 ; SB1.2 159.3,48.21 159.35,48.16 161.78,48.16 XS11.6 XS11.5
  Bottom Layer w1.5: XS10.20 XS10.18 XS10.16 XS10.14 XS10.12 XS10.10 XS10.8 XS10.6 XS10.4
I2C3_SCL: DD5.21 DD8.6 R39.1 | length 19.8
  Top Layer w0.254: 127.9,51.6 128.787,51.6 131.7,48.687 DD5.21
  Top Layer w0.5: DD8.6 123.165,56.935 123.4,56.7 123.4,55.225 R39.1
  Top Layer w0.6: R39.1 123.425,51.951 123.776,51.6 127.9,51.6
I2C3_SDA: DD5.22 DD8.5 R38.1 | length 21
  Top Layer w0.254: 128.8,50.7 131.198,48.302 131.198,46.752 DD5.22
  Top Layer w0.5: R38.1 120.993,55.218 120.993,56.993 121.895,57.895 DD8.5
  Top Layer w0.6: R38.1 120.975,53.17 123.445,50.7 128.8,50.7
JNTRST: DD5.40 R19.1 XS10.3 | length 46.1
  Top Layer w0.254: 131.7,31.4 DD5.40
  Top Layer w0.6: XS10.3 110.7,6.171 111.525,6.996 R19.1 111.525,19.025 121.5,29 129.3,29 131.7,31.4
JTCK: DD5.37 R23.2 XS10.9 | length 51.7
  Top Layer w0.254: 127.9,33.2 130.2,35.5 DD5.37
  Top Layer w0.6: XS10.9 103.08,6.171 102.1,7.151 102.1,7.5 102.075,7.525 R23.2 102.075,18.975 v1(115.3,32.2) ; v1(121,33.2) 127.9,33.2
  Bottom Layer w0.6: v1(115.3,32.2) 116.3,33.2 v1(121,33.2)
JTDI: DD5.38 R20.1 XS10.5 | length 45.6
  Top Layer w0.254: 130.3,34 130.7,34.4 DD5.38
  Top Layer w0.6: XS10.5 107.969,6.091 107.969,6.708 107.925,6.751 R20.1 107.925,17.225 122.4,31.7 123.9,31.7 128,31.7 130.3,34
JTDO: DD5.39 R22.1 XS10.13 | length 58.7
  Top Layer w0.254: 131.073,33 131.2,33.127 DD5.39
  Top Layer w0.6: XS10.13 98,6.1 96.725,7.375 R22.1 96.725,16.725 111,31 v1(112,31) ; v1(123.9,30.4) 128.473,30.4 131.073,33
  Bottom Layer w0.6: v1(112,31) 123.119,31 123.719,30.4 v1(123.9,30.4)
JTMS: DD5.34 R21.1 XS10.7 | length 47.1
  Top Layer w0.254: 119.4,31.7 119.4,35.5 124.875,40.975 DD5.34
  Top Layer w0.6: XS10.7 105.7,5.98 105.7,8 105.675,8.025 R21.1 105.675,17.975 119.4,31.7
LCD_SCL: DD5.42 DD7.3 R34.1 | length 25.9
  Top Layer w0.254: 132.7,36.4 DD5.42
  Top Layer w0.3: 132.7,36.4 140.5,28.6 148.074,28.6 148.25,28.776 DD7.3 148.25,31.824 148.426,32 149.306,32 149.316,31.991 149.316,31.648 R34.1@149.175,31.507
LCD_SDA: DD5.43 DD7.4 R35.1 | length 23.7
  Top Layer w0.254: DD5.43 133.2,36.8 133.225,36.775
  Top Layer w0.3: 133.225,36.775 140,30 146.599,30 146.775,30.176 146.775,32.1 147.574,32.1 147.75,31.924 DD7.4
LNA: DD5.31 XS14.5 | length 60.1
  Top Layer w0.254: 115.3,43.7 115.4,43.8 121.4,43.8 122.725,42.475 DD5.31
  Top Layer w1: XS14.5 72.796,51.444 75.856,51.444 83.6,43.7 115.3,43.7
NetC16_2: R5.2 XS7.1 | length 9.9
  Top Layer w0.6: R5.2 130.175,90.875 133.8,94.5 XS7.1
NetC17_2: C17.2 C18.1 DA2.2 DA2.5 R8.1 VD1.2 | length 21.6
  Top Layer w0.6: VD1.2@127.2,78.65 VD1.2 129.05,78.65 v1(131.2,76.5) 131.625,76.5 132.975,75.15 C18.1 C18.1@132.975,74.5 ; C17.2 R8.1 C18.1@132.975,74.5 ; v1(133.8,78.4) 133.856,78.344 136.38,78.344 DA2.2 ; DA2.5 135.452,74.53 135.422,74.5 C18.1@132.975,74.5
  Bottom Layer w0.6: v1(131.2,76.5) 133.1,78.4 v1(133.8,78.4)
NetC18_2: C18.2 DA2.1 VD1.1 | length 14.2
  Top Layer w0.6: VD1.1 129.44,74.75 v1(129.475,74.785) ; v1@129.475,74.775 131.2,74.775 C18.2 ; v1(131.85,79.8) 132,79.8 132.2,79.6 136.374,79.6 DA2.1
  Bottom Layer w0.6: v1(129.475,74.785) 129.475,76.925 131.85,79.3 v1(131.85,79.8)
NetC19_2: R10.2 XS7.3 | length 9.4
  Top Layer w0.6: XS7.3@141.64,94.3 145.1,94.3 146.825,92.575 R10.2
NetC20_2: C20.2 C21.1 DA2.10 DA2.13 R13.2 VD3.2 | length 20.4
  Top Layer w0.6: C21.1 144.05,78.125 143.835,78.34 DA2.13 141.212,78.336 139.943,78.336 139.4,77.793 139.4,75.2 140.066,74.534 141.212,74.534 DA2.10 146.123,74.53 ; C20.2 R13.2 146.425,75.949 146.726,76.25 VD3.2
NetC21_2: C21.2 DA2.14 VD3.1 | length 9.8
  Top Layer w0.6: DA2.14 143.785,79.61 C21.2@144.05,79.875 ; v1(144.3,81.6) 144.35,81.55 144.35,79.875 C21.2 ; VD3.1 v1(148,81.5)
  Bottom Layer w0.6: v1(144.3,81.6) 147.9,81.6 v1(148,81.5)
NetC22_2: C22.2 DD5.5 R27.2 ZQ1.1 | length 26.3
  Top Layer w0.254: DD5.5 142.625,41.975 143,41.6 ; C22.2@148.4,41.4 149.056,41.4
  Top Layer w0.6: 143,41.6 147.875,41.6 148.05,41.425 C22.2 148.4,41.4 148.4,39.176 148.751,38.825 152.075,38.825 ZQ1.1 155.749,38.85 156.1,39.201 R27.2
NetC23_2: C23.2 DD5.6 R27.1 ZQ1.2 | length 27.2
  Top Layer w0.254: DD5.6 145.012,42.475 145.087,42.4
  Top Layer w0.6: 145.087,42.4 146.374,42.4 146.8,42.826 146.8,46.024 147.151,46.375 C23.2 148.4,47.849 148.751,48.2 151.95,48.2 ZQ1.2 154.75,48.35 156.1,47 R27.1
NetC32_2: C32.2 DD9.4 XS13.1 | length 10.8
  Top Layer w0.6: XS13.1 XS13.1@85.604,33.034 ; v1(87.9,38.2) 87.906,38.194 C32.2 DD9.4@87.906,35.006
  Bottom Layer w0.6: XS13.1 86.9,34.33 86.9,37.849 87.251,38.2 v1(87.9,38.2)
NetDA2_3: DA2.3 R7.2 | length 12.5
  Top Layer w0.6: R7.2 130.3,83.74 130.3,79.6 132.83,77.07 DA2.3
NetDA2_6: DA2.6 DA2.7 R6.2 | length 3.4
  Top Layer w0.6: R6.2 136.3,71.98 136.31,71.99 DA2.7 DA2.6
NetDA2_8: DA2.8 DA2.9 R11.2 | length 3.7
  Top Layer w0.6: DA2.9 DA2.8 141.216,69.775 R11.2@141.4,69.775
NetDA2_12: DA2.12 R12.2 | length 12.5
  Top Layer w0.6: DA2.12 145.649,77.07 146,77.421 R12.2@146,85
NetDD3_6: DD3.6 R2.2 XS2.2 | length 10.6
  Top Layer w0.6: DD3.6 156.64,12.663 156.64,10.94 156.325,10.625 156.325,4.15 157.2,3.275 XS2.2
NetDD3_7: DD3.7 R2.1 XS2.1 | length 10.8
  Top Layer w0.6: DD3.7 157.96,12.663 157.96,10.64 158.075,10.525 R2.1 158.075,7.225 159.358,5.942 159.358,2.982 XS2.1
NetDD3_8: DD3.8 R1.1 | length 4
  Top Layer w0.6: DD3.8 159.23,12.713 159.23,14.03 159.725,14.525 R1.1
NetDD5_20: DD5.20 R24.2 | length 48
  Top Layer w0.254: v1(127.2,52.9) 128.3,52.9 132.2,49 DD5.20
  Top Layer w0.6: v1(141.7,49.7) 147.8,49.7 150.275,52.175 161.125,52.175 R24.2
  Bottom Layer w0.6: v1(127.2,52.9) 130.4,49.7 v1(141.7,49.7)
NetDD5_32: DD5.32 R43.1 | length 8.6
  Top Layer w0.254: R43.1 120.675,42.148 120.848,41.975 DD5.32
NetDD5_33: DD5.33 R44.1 | length 8.8
  Top Layer w0.254: R44.1@120.575,40.3 123.4,40.3 124.575,41.475 DD5.33
NetDD5_44: DD5.44 R26.2 | length 45.6
  Top Layer w0.254: DD5.44 133.702,38.698 133.702,36.986 138.784,31.904 139.696,31.904 v1(139.8,31.8)
  Top Layer w0.6: v1(168.4,35.7) R26.2
  Bottom Layer w0.6: v1(139.8,31.8) 143.8,27.8 160.4,27.8 v1@168.5,35.9
NetDD6_14: DD6.14 DD7.6 R33.1 | length 12.9
  Top Layer w0.3: R33.1 145.975,23.075 148.25,25.35 DD7.6
  Top Layer w0.6: DD6.14 140.73,23.47 141.125,23.075 R33.1
NetDD6_15: DD6.15 DD7.5 R32.1 | length 11.2
  Top Layer w0.3: R32.1 146.825,25.125 147.75,26.05 DD7.5
  Top Layer w0.6: DD6.15 142.94,24.74 143.325,25.125 R32.1
NetDD7_7: DD7.7 DD7.8 R36.1 | length 1.9
  Top Layer w0.254: DD7.7 DD7.8 150.205,26.795 R36.1@150.5,26.5
NetDD8_1: DD8.1 R40.1 | length 4.3
  Top Layer w0.6: DD8.1 125.726,64.984 125.726,66.426 127.001,67.701 127.001,68.525 R40.1
NetDD8_2: DD8.2 R41.1 | length 4
  Top Layer w0.5: DD8.2 124.464,64.993 124.464,66.564 124.9,67 124.9,68.475 124.95,68.525 R41.1
NetDD8_3: DD8.3 R42.1 | length 3.6
  Top Layer w0.6: DD8.3 123.165,65.634 123.2,65.669 R42.1
NetR5_1: R5.1 R7.1 | length 4.4
  Top Layer w0.6: R5.1@128.425,88.9 128.4,88.875 128.4,84.82 R7.1
NetR7_3: R7.3 R9.2 | length 4.2
  Top Layer w0.6: R7.3 133.725,84.625 R9.2
NetR10_1: R10.1 R12.1 | length 4.1
  Top Layer w0.6: R12.1 R10.1@148.6,89.1
NetR12_3: R12.3 R14.2 | length 4.3
  Top Layer w0.6: R14.2 143.125,85.562 143.52,85.167 R12.3
NetR17_2: R17.2 VD4.2 XS8.4 | length 10.3
  Top Layer w0.6: 122.03,92.59 122.245,92.375 R17.2
  Top Layer w1.5: XS8.4 122.03,92.59 VD4.2
NetR24_1: R24.1 XS11.4 | length 11.1
  Top Layer w0.6: XS11.4 164.65,45.25 166.999,45.25 167.4,45.651 167.4,47.375 164.35,50.425 R24.1
NetR26_1: R26.1 XS11.3 | length 6.9
  Top Layer w0.6: XS11.3 168.049,44 168.4,43.649 R26.1
NetR28_2: R28.2 XS12.3 | length 10.9
  Bottom Layer w0.5: R28.2 122.24,9.173 125.05,6.363 125.05,4.893 126.34,3.603 XS12.3
NetVT1_2: VT1.2 XS12.16 | length 11.1
  Bottom Layer w0.8: VT1.2 132.837,11.311 136.114,11.311 XS12.16
NRST: C24.2 DD5.7 R25.2 SB1.1 XS10.15 | length 111.6
  Top Layer w0.254: DD5.7 144.775,42.975 145.4,43.6 v1(145.5,43.6)
  Top Layer w0.6: v1(104.1,26.1) 112.5,34.5 v1(114.3,34.5) ; v1(140.1,40.8) 144.019,40.8 145.419,39.4 v1(145.6,39.4) ; C24.2 145.45,44.925 145.45,43.65 v1(145.5,43.6)
  Top Layer w1.3: SB1.1 159.3,39.01 159.45,38.86 161.765,38.86 R25.2
  Top Layer w1.5: SB1.1 v1(159.3,43.6)
  Bottom Layer w0.6: XS10.15 95.46,9.355 94,10.815 94,16 v1(104.1,26.1) ; v1(114.3,34.5) 120.9,34.5 123.3,36.9 139.7,36.9 140.1,37.3 v1@140.1,40.6 ; v1(145.6,39.4) 145.55,39.45 145.55,43.55 v1(145.5,43.6) v1(159.3,43.6)
P0: DD6.4 XS12.4 | length 25.8
  Top Layer w0.6: XS12.4 121.131,11.054 121.131,21.849 121.482,22.2 DD6.4
P1: DD6.5 XS12.5 | length 26.3
  Top Layer w0.5: 127.6,7.4 127.6,4.883 128.88,3.603 XS12.5
  Top Layer w0.6: 127.6,7.4 123.349,11.651 123.349,12.959 122.4,13.908 122.4,20.579 122.751,20.93 DD6.5
P2: DD6.6 XS12.6 | length 21.2
  Top Layer w0.6: DD6.6 123.651,19.66 123.3,19.309 123.3,16 128.88,10.42 XS12.6
P3: DD6.7 R37.1 VT1.1 | length 10.9
  Top Layer w0.6: R37.1 126.275,18.39 DD6.7 130.91,18.39 131.51,17.79 VT1.1
P4: DD6.9 XS12.11 | length 17
  Top Layer w0.5: XS12.11 136.5,3.603 137.75,4.853 137.75,7.95
  Top Layer w0.6: 137.75,7.95 139.9,10.1 139.9,16.769 139.549,17.12 DD6.9
P5: DD6.10 XS12.12 | length 15.4
  Top Layer w0.6: XS12.12 136.5,15.9 135.3,17.1 135.3,18.039 135.651,18.39 DD6.10
P6: DD6.11 XS12.13 | length 24.6
  Top Layer w0.5: DD6.11 143.907,19.66 144.2,19.367 144.2,10.4 140.33,6.53 140.33,4.893 139.04,3.603 XS12.13
P7: DD6.12 XS12.14 | length 20.4
  Top Layer w0.5: DD6.12 137.895,20.915 141.985,20.915 v1(142,20.9) ; XS12.14 139.25,6.055 139.25,7.25 142,10 v1(142,18.3)
  Bottom Layer w0.5: v1(142,18.3) v1(142,20.9)
PTT: DD5.28 XS14.3 | length 61.5
  Top Layer w0.254: 124.225,44.102 124.352,43.975 DD5.28
  Top Layer w0.6: 118,47.8 120.527,47.8 124.225,44.102
  Top Layer w1: XS14.3 72.796,56.524 75.276,56.524 84,47.8 118,47.8
PTT_KSD: DD5.29 XS14.4 | length 60.6
  Top Layer w0.254: 120.116,46.37 120.399,46.37 123.294,43.475 DD5.29
  Top Layer w1: XS14.4 72.796,53.984 75.316,53.984 82.93,46.37 120.116,46.37
PWM_1: DD5.10 R17.1 | length 85.7
  Top Layer w0.254: DD5.10 139.175,44.475 140.3,45.6 v1(140.3,47.3)
  Top Layer w0.6: R17.1 126.875,90.625 v1(126.9,90.6)
  Bottom Layer w0.6: v1@126.9,90.3 125.9,89.3 116.8,89.3 114.7,87.2 114.7,49.5 117.1,47.1 128.509,47.1 128.709,47.3 v1(140.3,47.3)
RELAY: DD5.27 XS14.2 | length 62.3
  Top Layer w0.254: 120.77,49.1 125.395,44.475 DD5.27
  Top Layer w1: XS14.2 75.14,59.16 85.2,49.1 120.77,49.1
RS_EN: DD5.11 | length 18
  Top Layer w0.254: DD5.11 136.977,44.977 138.395,44.977 139,45.582 139,50.2 139.6,50.8 144.169,50.8
  Top Layer w0.6: 144.169,50.8 144.9,50.8 148.4,54.3
RS_RX: DD5.13 | length 15.6
  Top Layer w0.254: DD5.13 135.7,50 137.9,52.2 141.7,52.2
  Top Layer w0.6: 141.7,52.2 142.35,52.2 145.75,55.6
RS_TX: DD5.12 | length 16.7
  Top Layer w0.254: DD5.12 138.251,45.475 138.4,45.624 138.4,51 138.973,51.573 143.362,51.573
  Top Layer w0.6: 143.362,51.573 143.718,51.573 146.745,54.6
SWR_F: DD5.19 R11.1 VD2.2 | length 36.3
  Top Layer w0.254: 127.8,54.513 132.7,49.613 DD5.19
  Top Layer w0.6: 127.8,54.513 127.8,59.6 v1(131.1,62.9) ; v1(140.9,63.1) 140.481,63.1 139.75,63.831 VD2.2 140.849,64.7 141.2,65.051 R11.1
  Bottom Layer w0.6: v1(131.1,62.9) 140.7,62.9 v1(140.9,63.1)
SWR_R: DD5.18 R6.1 VD2.1 | length 31
  Top Layer w0.254: 128.6,54.6 133.2,50 DD5.18
  Top Layer w0.6: 128.6,54.6 128.6,58.4 133.3,63.1 137.499,63.1 137.85,63.451 VD2.1 136.651,64.7 136.3,65.051 R6.1
T_1: DD5.25 R15.1 XS8.3 | length 58.4
  Top Layer w0.254: 123.8,49.1 127.425,45.475 DD5.25
  Top Layer w0.6: v1(115.9,52.1) 120.831,52.1 123.8,49.131 123.8,49.1 ; v1(117.5,86.7) 117.575,86.775 R15.1 117.575,90.875 118.38,91.68 XS8.3
  Bottom Layer w0.6: v1(115.9,52.1) 115.9,85.1 v1(117.5,86.7)
USB_D_N: DD9.3 R43.2 XS13.2 | length 38.6
  Top Layer w0.268: XS13.2@85.195,34.816 85.712,34.3 89.8,34.3 ; XS13.2@85.2,34.821 XS13.2 ; DD9.3@89.8,35.019 89.8,34.3 ; R43.2 118.759,42.234 118.759,41.742 118.602,41.585 113.52,41.585 106.234,34.3 89.8,34.3
USB_D_P: DD9.2 R44.2 XS13.3 | length 40.7
  Top Layer w0.268: XS13.3 83.388,35.13 84.688,33.829 89.8,33.829 ; DD9.2 89.8,33.829 ; R44.2 118.759,40.466 118.759,40.958 118.602,41.115 113.715,41.115 106.429,33.829 89.8,33.829
pads on no net: DD3.5 DD5.2 DD5.3 DD5.4 DD5.41 DD6.13 XS10.11 XS10.17 XS10.19 XS12.7 XS12.8 XS12.9 XS12.10 XS13.S1 XS13.S2

## Other copper
Top Layer:
  rectangle net 3V3: 101.6,53.5 119.6,55.9
  region net +12V: 116,94.9 116,97.1 110.4,97.1 110.4,94.9
  rectangle net +12V: 115,92.9 116.7,97.1
  rectangle net +12V: 95.1,92.4 110.7,97.1
  rectangle net 3V3: 97.3,67.5 98.4,73
  rectangle net 3V3: 94.6,65 101.3,69.6
  rectangle net 3V3: 94.6,56.1 101.3,66.4
  rectangle net +12V: 84.5,77.1 99.5,97.1
  rectangle net +12V: 94.8,71.6 96.2,78.2
  rectangle net 5V: 86.8,67.4 87.9,72.9
  rectangle net 5V: 84,56.6 90.6,69.3
  region net +8V: 115.7,68.5 115.7,71.7 111.9,71.7 111.9,68.5
  rectangle net 3V3: 139.5,38.1 142.8,39.7
  rectangle net 3V3: 138.2,36.3 140.7,39.7
  rectangle net +12V: 84.5,71.6 85.9,78.2
  rectangle net 3V3: 112.5,5 114,10.9
  region net 3V3: 102.2,55.6 101.3,56.5 98.6,56.5 101.3,53.8 101.3,56.5 94.6,56.5 94.6,53.5 102.2,53.5
  region net 3V3: 101.258,69.445 94.558,69.445 97.358,70.845 98.458,70.845
  region net 5V: 90.7,69.1 84,69.1 86.8,70.5 87.9,70.5
Bottom Layer:
  rectangle net 3V3: 116.9,54.4 127.5,55.9

## Text inside footprints (layer, text, board x,y; h text height)
XS11: Top Overlay "2" at 163.908,38.92 h1.27 r90; Top Overlay "6" at 163.908,48.064 h1.27 r90; Top Overlay "5" at 166.448,48.064 h1.27 r90; Top Overlay "1" at 166.448,39.428 h1.27 r90